# EAGLE board samd21_sensorhub_1.1.1_jan2022 (EAGLE 9.6.2)
MNAME: SensorHub; SYSTEM: ModularSim; VERSION: v1.1.1 Jan 2022
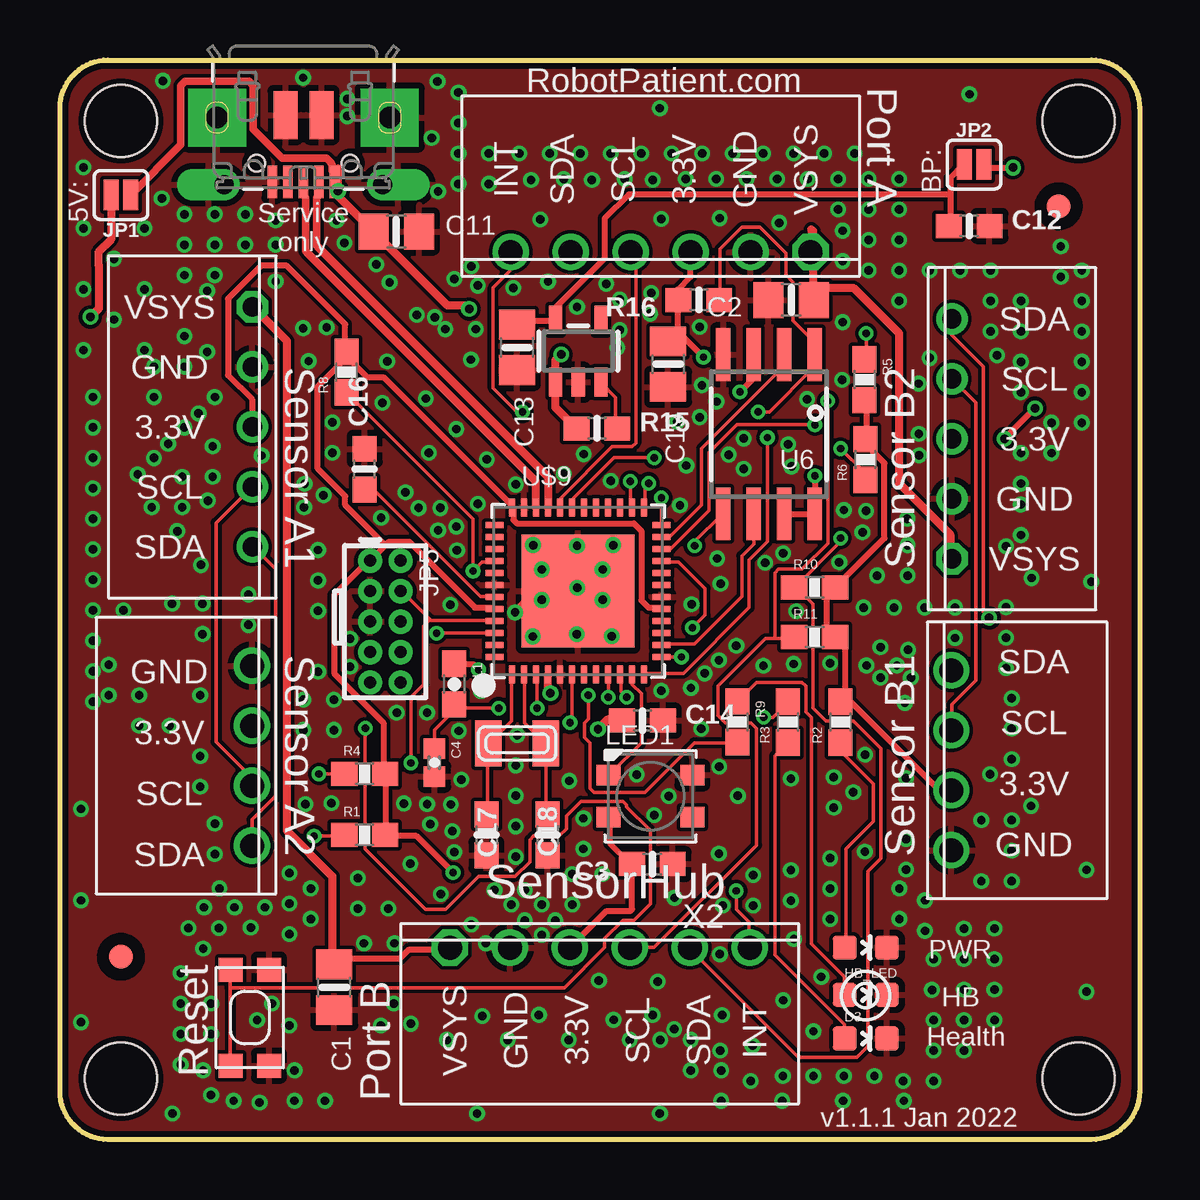
[diagram p0: board, top side]
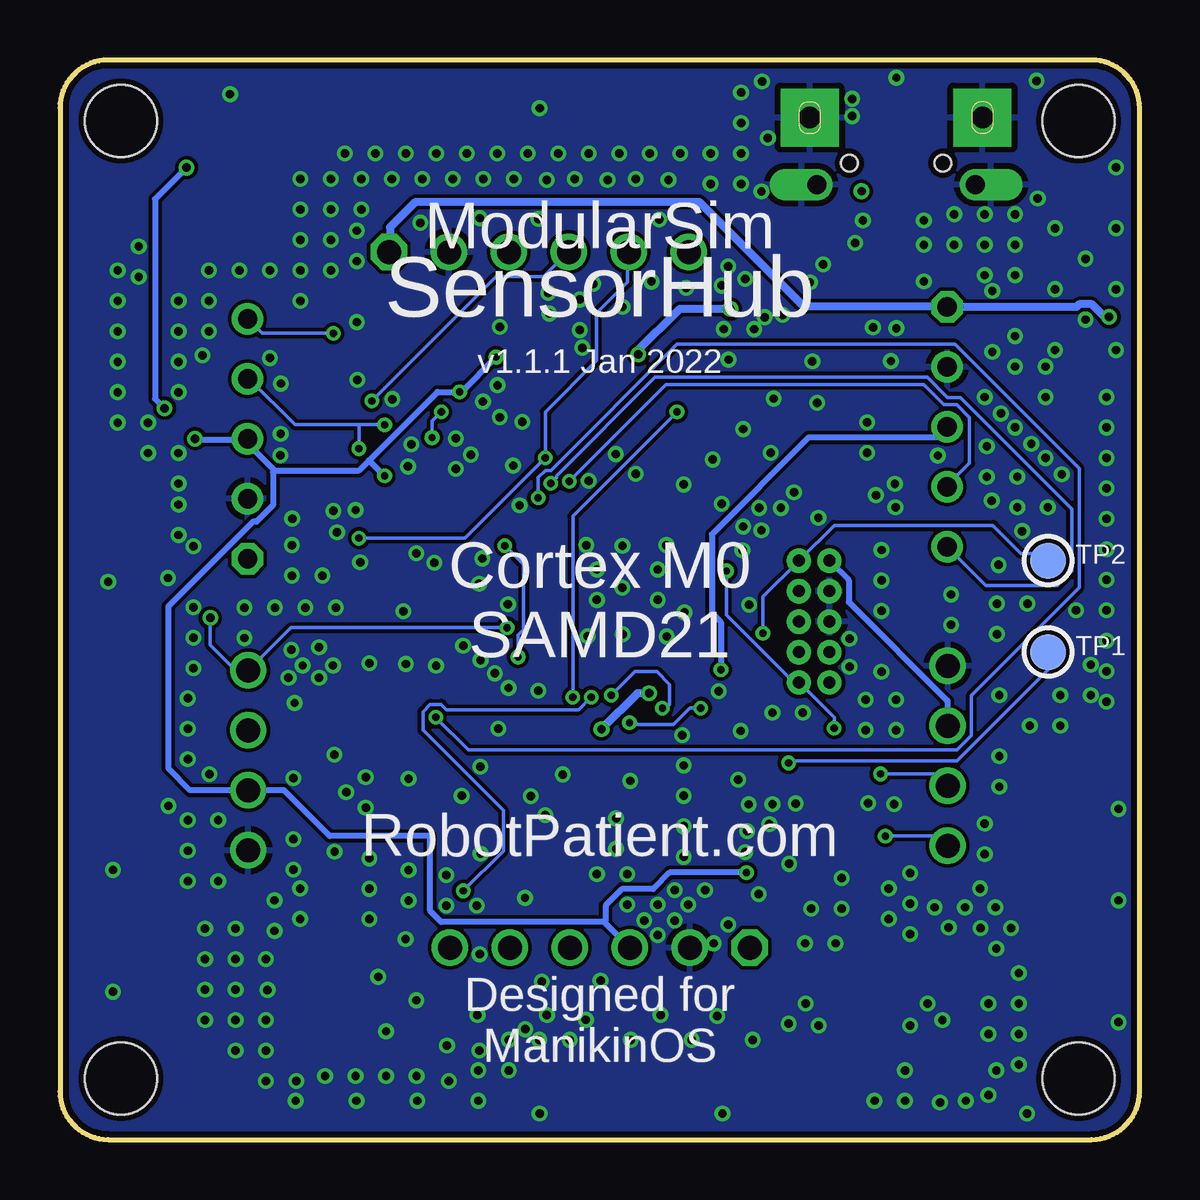
[diagram p1: board, bottom side, seen from below]

Size 45 x 45 mm. Coordinates in mm from the lower left corner, seen from the top.
Outline: 2,45 43,45 arc-90 45,43 45,2 arc-90 43,0 2,0 arc-90 0,2 0,43 arc-90 2,45
Copper layers (1*16): Top 0.035mm / dielectric 1.5mm / Bottom 0.035mm
Design rules "ITEADstudio_DRC_Recent_june2014": minimum track width 6mil, minimum drill 12mil, track to track 6mil, track to pad 6mil, pad to pad 6mil, via to via 6mil, smd to smd 0mil, copper to edge 10mil, drill to drill 10mil, minimum pad ring 10mil, minimum via ring 6mil, stop-mask expansion 2mil, vias tented up to drill 100mil, thermal gap 10mil
Net classes: 1 usb: width 0.152 mm, drill 0.254 mm, clearance 0.152 mm; 2 ground: width 0.254 mm, drill 0.254 mm, clearance 0.152 mm; 3 power: width 0.254 mm, drill 0.254 mm, clearance 0.152 mm
Holes 3 mm at 2.54,42.46 2.54,2.54 42.46,2.54 42.46,42.46

## Footprints (pad centres in the part's own frame; a part is rotated, then mirrored left to right if it is on the bottom)
0805-NO = smd 1.24 x 1.5: 1 -0.95,0; 2 0.95,0
0603-NO = smd 1.075 x 1: 1 -0.85,0; 2 0.85,0
0402-CAP = smd 0.85 x 0.9: 1 -0.58,0; 2 0.58,0
LED-0603 = smd 1 x 1: A 0,-0.877; C 0,0.877
SMT-JUMPER_2_NC_PASTE_SILK = smd 0.635 x 1.27: 1 -0.406,0; 2 0.406,0
2X5-PTH-1.27MM = drill 0.508 pad 1: 1 -2.54,-0.635; 2 -2.54,0.635; 3 -1.27,-0.635; 4 -1.27,0.635; 5 0,-0.635; 6 0,0.635; 7 1.27,-0.635; 8 1.27,0.635; 9 2.54,-0.635; 10 2.54,0.635
0603 = smd 1.1 x 1: 1 -0.85,0; 2 0.85,0
LED3535 = smd 1 x 0.85: 1 -1.75,0.875; 2 -1.75,-0.875; 3 1.75,-0.875; 4 1.75,0.875
0603-RES = smd 1.1 x 1: 1 -0.85,0; 2 0.85,0
KMR2 = smd 1 x 1: 1 2,0.8; 2 2,-0.8; 3 -2,0.8; 4 -2,-0.8
TESTPOINT_ROUND_1.5MM = smd 1.5 x 1.5: P$1 0,0
SOT23-5 = smd 0.55 x 1.2: 1 -0.95,-1.3; 2 0,-1.3; 3 0.95,-1.3; 4 0.95,1.3; 5 -0.95,1.3
SOIC8_208MIL = smd 0.6 x 2.2: 1 -1.905,-3.315; 2 -0.635,-3.315; 3 0.635,-3.315; 4 1.905,-3.315; 5 1.905,3.315; 6 0.635,3.315; 7 -0.635,3.315; 8 -1.905,3.315
PTSM_M6_THRHOLE = drill 1 octagon: P1 6.25,1 | drill 1: P2 3.75,1; P3 1.25,1; P4 -1.25,1; P5 -3.75,1; P6 -6.25,1
PTSM_M4_TH = drill 1: P1 3.75,1; P2 1.25,1; P3 -1.25,1; P4 -3.75,1
TQFN48_7MM = smd 0.25 x 0.75: 1 -2.75,-3.475; 2 -2.25,-3.475; 3 -1.75,-3.475; 4 -1.25,-3.475; 5 -0.75,-3.475; 6 -0.25,-3.475; 7 0.25,-3.475; 8 0.75,-3.475; 9 1.25,-3.475; 10 1.75,-3.475; 11 2.25,-3.475; 12 2.75,-3.475; 25 2.75,3.475; 26 2.25,3.475; 27 1.75,3.475; 28 1.25,3.475; 29 0.75,3.475; 30 0.25,3.475; 31 -0.25,3.475; 32 -0.75,3.475; 33 -1.25,3.475; 34 -1.75,3.475; 35 -2.25,3.475; 36 -2.75,3.475 | smd 0.75 x 0.25: 13 3.475,-2.75; 14 3.475,-2.25; 15 3.475,-1.75; 16 3.475,-1.25; 17 3.475,-0.75; 18 3.475,-0.25; 19 3.475,0.25; 20 3.475,0.75; 21 3.475,1.25; 22 3.475,1.75; 23 3.475,2.25; 24 3.475,2.75; 37 -3.475,2.75; 38 -3.475,2.25; 39 -3.475,1.75; 40 -3.475,1.25; 41 -3.475,0.75; 42 -3.475,0.25; 43 -3.475,-0.25; 44 -3.475,-0.75; 45 -3.475,-1.25; 46 -3.475,-1.75; 47 -3.475,-2.25; 48 -3.475,-2.75 | smd 4.7 x 4.7: THERMAL 0,0
PTSM_M5_THRHOLE = drill 0.8 octagon: P1 5,1 | drill 0.8: P2 2.5,1; P3 0,1; P4 -2.5,1; P5 -5,1
FIDUCIAL_1MM = smd 1 x 1: 1 0,0
XTAL3215 = smd 1.1 x 1.9: P$1 1.2,0; P$2 -1.2,0
4UCONN_20329_V2 = smd 1 x 2: BASE@1 -0.75,-2; BASE@2 0.75,-2 | smd 0.4 x 1.35: D+ 0,0.775; D- -0.65,0.775; GND 1.3,0.775; ID 0.65,0.775; VBUS -1.3,0.775 | drill 0.8 pad 1.143 offset: SPRT@1 -3.3,0.9; SPRT@2 3.3,0.9 | drill 0.9 pad 2.413 square: SPRT@3 -3.6,-1.9; SPRT@4 3.6,-1.9 | hole 0.7: -1.95,0; 1.95,0

## Placement (x,y rotation side)
C1  10uF  [0805-NO]  11.43,6.35 270 top
C2  10uF  [0805-NO]  30.48,35 180 top
C3  1uF  [0603-NO]  24.69,11.48 180 top
C4  0.1uF  [0402-CAP]  15.61,15.71 270 top
C11  10µF  [0805-NO]  14.02,37.85 0 top
C12  1uF  [0603-NO]  37.9,38.07 0 top
C13  10µF  [0805-NO]  19.05,33.02 270 top
C14  1uF  [0603-NO]  24.28,17.46 0 top
C16  1uF  [0603-NO]  12.7,27.94 90 top
C17  22pF  [0603-NO]  17.78,12.7 270 top
C18  22pF  [0603-NO]  20.32,12.7 270 top
C19  10uF  [0805-NO]  25.35,32.32 270 top
D2  GREEN  [LED-0603]  33.59,8 270 top
D3  BLUE  [LED-0603]  33.59,4.21 270 top
HB_LED  RED  [LED-0603]  33.59,6.03 270 top
JP1  JUMPER-SMT_2_NC_PASTE_SILK  [SMT-JUMPER_2_NC_PASTE_SILK]  2.54,39.37 180 top
JP2  JUMPER-SMT_2_NC_PASTE_SILK  [SMT-JUMPER_2_NC_PASTE_SILK]  38.1,40.64 0 top
JP5  CORTEX_DEBUGPTH  [2X5-PTH-1.27MM]  13.56,21.59 270 top
L1  FB - 30Ohm  [0603]  16.43,18.99 270 top
LED1  WS2812B3535  [LED3535]  24.61,14.31 0 top
R1  4k7  [0603-RES]  12.7,12.7 0 top
R2  470Ω  [0603-RES]  32.54,17.4 90 top
R3  330  [0603-RES]  30.35,17.4 90 top
R4  4k7  [0603-RES]  12.7,15.24 0 top
R5  4k7  [0603-RES]  33.54,31.67 270 top
R6  4k7  [0603-RES]  33.58,28.35 90 top
R8  10K  [0603-RES]  11.95,31.99 90 top
R9  330  [0603-RES]  28.23,17.41 270 top
R10  4k7  [0603-RES]  31.46,23.01 0 top
R11  4k7  [0603-RES]  31.46,20.94 0 top
R15  100k  [0603-NO]  22.38,29.64 0 top
R16  10K  [0603-NO]  26.63,35 180 top
SW1  SPST_TACT-KMR2  [KMR2]  7.91,5.08 90 top
TP1  [TESTPOINT_ROUND_1.5MM]  3.81,20.32 0 bottom
TP2  [TESTPOINT_ROUND_1.5MM]  3.81,24.13 0 bottom
U4  AP2112-3.3  [SOT23-5]  21.6,32.87 0 top
U6  2MB Flash  [SOIC8_208MIL]  29.55,29.4 180 top
U$1  PHOENIX_PTSM_M6_TH_I2CPPANGLE  [PTSM_M6_THRHOLE]  22.5,9 180 top
U$2  PHOENIX_PTSM_M6_TH_I2CPPANGLE  [PTSM_M6_THRHOLE]  25.04,36 0 top
U$4  PHOENIX_PTSM_M4_THANGLE  [PTSM_M4_TH]  36.15,15.81 270 top
U$8  PHOENIX_PTSM_M4_THANGLE  [PTSM_M4_TH]  9,16 90 top
U$9  ATSAMD21G18_QFN  [TQFN48_7MM]  21.59,22.86 0 top
U$18  PHOENIX_PTSM_M5_TH_I2C++  [PTSM_M5_THRHOLE]  36.18,29.21 270 top
U$21  PHOENIX_PTSM_M5_TH_I2C++  [PTSM_M5_THRHOLE]  9.02,29.71 90 top
U$34  FIDUCIAL""  [FIDUCIAL_1MM]  41.63,38.9 0 top
U$35  FIDUCIAL""  [FIDUCIAL_1MM]  2.54,7.62 0 top
X2  32.768  [XTAL3215]  19.05,16.51 180 top
X3  microUSB  [4UCONN_20329_V2]  10.15,40.7 180 top

## Library data of the parts
C1-C3 C11-C14 C16-C19 LED1 R15 R16 TP1 TP2 U4 U6 U$9 X3 = microbuilder
C4 = SparkFun-Capacitors; PROD_ID: CAP-12416
D2 HB_LED = SparkFun-LED; PROD_ID: DIO-00819
D3 = SparkFun-LED; PROD_ID: DIO-08575
JP1 JP2 = SparkFun-Jumpers
JP5 = samd21-temp
L1 = SparkFun-Passives; PROD_ID: RES-07859
R1-R6 R9-R11 = SparkFun-Resistors; PROD_ID: RES-00818
R8 = SparkFun-Resistors; PROD_ID: RES-00824
SW1 = adafruit
U$1 U$2 U$4 U$8 U$18 U$21 = jk_customs
U$34 U$35 = microbuilder; BOM: EXCLUDE
X2 = adafruit2

## Nets
3.3V [power]: C3.2 C19.1 JP2.2 JP5.1 L1.1 LED1.2 R1.2 R2.2 R4.2 R5.2 R6.2 R8.2 R10.2 R11.2 R16.2 U6.3 U6.7 U6.8 U$1.P3 U$2.P3 U$4.P2 U$8.P2 U$9.17 U$9.36 U$9.44 U$18.P3 U$21.P3
3.3V_AP [power]: C12.1 C13.1 JP2.1 U4.5
5V [power]: C1.1 C2.1 JP1.2 U$1.P1 U$2.P1 U$18.P1 U$21.P1
!RESET: JP5.10 R8.1 SW1.1 SW1.3 U$9.40
A5: U$9.47
AREF [power]: C14.1 U$9.4
D0: U$9.16
D1: U$9.15
D2_FLASHMISO: U6.2 U$9.23
D3_FLASHSCK: U6.6 U$9.14
D4_FLASHMOSI: U6.5 U$9.13
D5_HEALTH: R3.2 U$9.24
D5_HEALTH_LED: D3.A R3.1
D6: U$9.29
D7: U$9.30
D8_NEOPIX: LED1.1 U$9.11
D10: U$9.27
D12: U$9.28
D14_HB: R9.2 U$9.3
D14_HB_LED: HB_LED.A R9.1
EN: R15.2 U4.3
FLASH_CS: R16.1 U6.1 U$9.12
GND [ground]: C1.2 C2.2 C3.1 C4.2 C11.2 C12.2 C13.2 C14.2 C16.2 C17.2 C18.2 C19.2 D2.C D3.C HB_LED.C JP5.3 JP5.5 LED1.4 SW1.2 SW1.4 U4.2 U6.4 U$1.P2 U$2.P2 U$4.P1 U$8.P1 U$9.5 U$9.18 U$9.35 U$9.42 U$9.THERMAL U$18.P2 U$21.P2 X3.BASE@1 X3.BASE@2 X3.GND X3.SPRT@1 X3.SPRT@2 X3.SPRT@3 X3.SPRT@4
INT4: U$1.P6 U$9.9
INT5: U$2.P6 U$9.10
INT8: U$9.7
INT9: U$9.8
MOSI: U$9.19
N$5: D2.A R2.1
N$8: X3.ID
N$15: C17.1 U$9.1 X2.P$1
N$17: C18.1 U$9.2 X2.P$2
RXLED: U$9.48
SCK: U$9.20
SCL: R11.1 U$1.P4 U$2.P4 U$9.32
SCL_SENSOR0: R6.1 U$4.P3 U$9.22 U$18.P4
SCL_SENSOR1: R4.1 U$8.P3 U$9.26 U$21.P4
SDA: R10.1 U$1.P5 U$2.P5 U$9.31
SDA_SENSOR0: R5.1 U$4.P4 U$9.21 U$18.P5
SDA_SENSOR1: R1.1 U$8.P4 U$9.25 U$21.P5
SWCLK: JP5.4 TP1.P$1 U$9.45
SWDIO: JP5.2 TP2.P$1 U$9.46
TXLED: U$9.39
USB_D_N [usb]: U$9.33 X3.D-
USB_D_P [usb]: U$9.34 X3.D+
VBUS [power]: C11.1 JP1.1 R15.1 U4.1 X3.VBUS
VDDANA: C4.1 L1.2 U$9.6
VDDCORE1: C16.1 U$9.43

## Tracks (layer width: path | path; a pad name or v marks a point on that pad's centre or on a via)
3.3V  (via drill 0.3, 0.35)
  Top 0.254: R5.2 33.6,30.79 33.6,29.26 R6.2 33.68,29.11 33.68,28.88 34.37,28.19 34.37,25.07 32.38,23.09 R10.2 31.94,22.64 31.94,21.31 R11.2 32.38,20.88 32.72,20.55 32.72,18.43 R2.2 32.61,18.21 32.99,18.21 36.58,14.63 37.11,14.63 U$4.P2 | U6.7 30.25,26.06 31.39,26.06 U6.8 31.47,26.21 v31.47,27.66 | v28.35,31.17 28.88,31.7 28.88,32.69 U6.3 | v26.82,32.61 25.83,33.6 C19.1 25.38,33.3 25.76,33.68 25.76,35.28 R16.2 25.76,35.43 26.29,35.97 26.29,36.96 U$2.P3 | v17.45,19.58 17.22,19.81 16.46,19.81 L1.1 | LED1.2 22.94,13.41 22.94,12.34 23.77,11.51 C3.2 23.85,11.35 23.85,9.6 23.77,9.53 22.78,9.53 U$1.P3 | U$9.17 24.99,22.17 24.54,22.17 24.23,22.48 24.23,25.38 23.93,25.68 19.05,25.68 18.9,25.83 18.9,26.29 U$9.36 18.82,26.44 13.49,31.77 12.8,31.77 11.96,32.61 R8.2 | 13.56,24.77 12.95,24.16 JP5.1 12.8,24.08 11.43,22.71 11.43,19.43 13.49,17.37 13.49,15.32 R4.2 13.56,15.24 13.56,12.72 R1.2 13.64,12.65 14.86,12.65 v16.38,11.12 | 13.56,24.77 13.72,24.92 14.55,24.92 17.3,22.17 18.06,22.17 U$9.44 | 13.56,24.77 11.89,26.44 11.89,26.82 10.74,27.96 10.74,31.39 11.89,32.54 11.89,32.77 R8.2 | U$21.P3 8,29.72 8,30.86 7.01,31.85 7.01,35.05 8.38,36.42 9.45,36.42 11.89,33.98 11.89,32.92 R8.2 | JP2.2 38.63,40.51 v39.73,40.51 | v40.64,30.48 v39.37,29.21
  Bottom 0.254: 32.12,28.31 32.54,27.89 36.04,27.89 | 32.12,28.31 29.26,31.17 v28.35,31.17 28.27,31.17 v26.82,32.61 | 36.04,27.89 37.11,28.96 37.11,29.18 | 37.11,29.18 U$18.P3 | 32.12,28.31 v31.47,27.66 | 36.04,27.89 36.12,27.81 36.12,26.44 36.8,25.76 36.96,25.76 40.49,22.23 40.49,15.48 39.57,14.56 U$4.P2 37.03,14.55 35.66,14.55 33.76,12.65 29.57,12.65 29.57,9.53 29.11,9.07 22.33,9.07 | v17.45,19.58 17.45,21.57 17.83,21.95 17.83,25.22 13.79,29.26 8.46,29.26 8.08,29.64 U$21.P3 | U$8.P2 8,17.3 8,18.29 12.12,22.4 12.12,23.32 12.88,24.08 JP5.1 | v39.73,40.51 41.03,39.2 41.03,30.87 v40.64,30.48 | v39.37,29.21 39.34,29.18 37.11,29.18 | 22.33,9.07 U$1.P3 | v16.38,11.12 19.58,11.12 20.27,10.44 21.57,10.44 22.25,9.75 22.25,9.14 22.33,9.07
3.3V_AP
  Top 0.254: C13.1 19.05,33.98 19.2,34.14 20.65,34.14 U4.5 20.65,34.29 20.65,34.67 22.71,36.73 22.71,38.41 23.7,39.4 37.11,39.4 | 37.11,39.4 37.11,40.08 37.64,40.62 JP2.1 | 37.11,39.4 37.11,38.1 C12.1
5V  (via drill 0.35)
  Top 0.254: U$1.P1 16.23,7.92 14.55,7.92 14.17,7.54 11.51,7.54 C1.1
  Top 0.33: U$2.P1 31.32,37.95 31.39,37.87 31.39,35.59 C2.1 31.55,35.51 33.07,35.51 34.98,33.6 34.98,27.36 37.11,25.22 37.11,24.23 U$18.P1 | C1.1 11.35,7.39 11.35,10.97 9.45,12.88 9.45,33.3 8.08,34.67 U$21.P1 | JP1.2 2.13,37.51 1.6,36.98 1.6,36.45 1.62,36.43 1.62,34.64 v1.27,34.29
  Bottom 0.33: U$2.P1 31.24,38.02 30.18,39.09 18.36,39.09 14.02,34.75 8.08,34.75 U$21.P1 2.63,34.7 2.52,34.82 1.98,34.82 1.45,34.29 v1.27,34.29
!RESET  (via drill 0.3)
  Top 0.152: 7.09,6.33 7.09,7.01 SW1.1 | 7.09,6.33 7.09,3.12 SW1.3 | U$9.40 18.06,24.08 17.6,24.08 v17.22,23.7 17.22,25.87 R8.1 | 7.09,6.33 21.03,6.33 22.71,8 22.71,8.38 23.47,9.14 23.93,9.14 24.61,9.83 24.61,12.88 23.62,13.87 23.62,13.95 23.47,14.1 21.72,14.1 21.11,13.49 21.11,12.95 20.8,12.65 19.74,12.65 19.58,12.5 19.58,11.58 18.97,10.97 17.45,10.97 16.08,9.6 15.24,9.6 12.72,12.12 v12.72,17.14
  Bottom 0.152: v17.22,23.7 17.22,21.87 14.4,19.05 JP5.10 14.17,19.05 12.72,17.6 v12.72,17.14
AREF  (via drill 0.35)
  Top 0.33: v22.43,17.11 22.82,17.5 23.41,17.5 C14.1 | U$9.4 20.34,19.36 20.34,18.82 v20.44,18.6
  Bottom 0.33: v20.44,18.6 20.93,18.6 v22.43,17.11
D2_FLASHMISO
  Top 0.152: U$9.23 25.07,25.15 25.45,25.15 26.75,26.44 26.75,28.8 30.18,32.23 30.18,32.69 U6.2
D3_FLASHSCK
  Top 0.152: U6.6 28.92,24.83 28.42,24.33 28.42,22.63 26.44,20.65 25.07,20.65 U$9.14
D4_FLASHMOSI  (via drill 0.3)
  Top 0.152: v25.91,20.12 U$9.13 | v26.45,24.75 26.45,24.93 27.58,26.06 U6.5
  Bottom 0.152: v25.91,20.12 25.91,21.03 25.68,21.26 25.68,23.98 v26.45,24.75
D5_HEALTH  (via drill 0.3)
  Top 0.152: v25.07,26.75 25.07,25.68 U$9.24 | v29.34,17.6 29.72,17.6 30.33,18.21 R3.2
  Bottom 0.152: v25.07,26.75 25.07,27.58 24.77,27.89 24.54,27.89 19.28,33.15 7.7,33.15 2.52,27.96 2.52,23.01 7.01,18.52 7.01,16.84 7.62,16.23 27.96,16.23 v29.34,17.6
D5_HEALTH_LED
  Top 0.152: D3.A 32.69,4.27 32.69,4.8 29.79,7.7 29.79,15.99 R3.1
D8_NEOPIX
  Top 0.152: U$9.11 23.85,19.36 23.85,18.97 24.23,18.59 24.23,16.54 22.94,15.24 LED1.1
D14_HB  (via drill 0.3)
  Top 0.152: R9.2 28.19,16.54 26.44,16.54 24.38,14.48 22.25,14.48 22.1,14.63 22.1,16.54 21.87,16.76 21.87,17.37 22.02,17.53 v22.02,18.52 | v19.89,17.98 19.89,19.36 U$9.3
  Bottom 0.152: v19.89,17.98 19.81,17.91 19.58,18.14 19.58,18.97 20.12,19.51 21.03,19.51 v22.02,18.52
D14_HB_LED
  Top 0.152: HB_LED.A 32.69,6.1 32.69,6.78 31.32,8.15 31.32,17.6 31.09,17.83 31.09,18.9 30.94,19.05 29.03,19.05 28.27,18.29 R9.1
EN
  Top 0.152: R15.2 23.16,29.64 23.16,30.94 22.55,31.55 U4.3
FLASH_CS  (via drill 0.3)
  Top 0.152: v29.49,29.26 29.49,24.92 28.73,24.16 28.73,22.17 25.98,19.43 24.38,19.43 U$9.12 | v29.11,30.33 29.57,30.33 31.39,32.16 31.39,32.69 U6.1 | 31.39,33.3 31.39,32.77 U6.1 | 31.39,33.3 30.56,34.14 30.56,35.74 30.25,36.04 30.25,36.96 29.18,38.02 28.42,38.02 27.51,37.11 27.51,35.36 R16.1 | 31.39,33.3 U6.1
  Bottom 0.152: v29.49,29.26 29.49,29.95 v29.11,30.33
GND  (via drill 0.35)
  Top 0.33: U$9.THERMAL 19.86,22.86 v18.97,21.97
  other vias: 10.99,26.86 13.39,25.92 14.4,26.97 15.38,28.63 19.72,24.78 23.06,24.78 21.55,24.75 19.71,20.97 23,20.98 21.56,23 26.11,28.09 28.5,27.95 30.49,28.05 25.84,26.44 21.55,34.71 29.98,38.21 27.36,40.04 24.71,40.01 22.17,40.01 19.63,40.01 18.9,35.5 11.53,38.32 8.99,38.32 8.99,35.78 11.11,33.86 13.64,32.44 11.35,28.63 11.42,17.07 14.03,17.79 15.3,17.79 15.3,13.98 10.22,13.98 9.56,9.83 12.42,10.9 14.61,11.49 17.75,8.18 13.94,8.18 14.63,4.83 10.36,32.45 17.13,32.51 15.62,34.28 17.14,36.4 13.18,36.47 40.06,25.2 33.62,19.76 29.32,19.75 27.47,19.98 26.3,18.82 28.26,14.33 24.77,13.53 27.47,11.91 32.26,15.1 30.47,15.04 30.47,11.23 32.11,11.72 34.99,10.46 30.15,5.8 25.6,4.6 19.96,5.19 17.6,5.14 8.22,4.98 8.32,1.54 6.63,8.81 36.35,6.24 35.14,2.44 36.06,8.7 39.67,15.85 35.22,18.2 34.06,23.51 39.43,22.19 27.39,24.22 32.68,26.24 32.63,34.07 31.14,30.86 36.25,32.58 35.8,29.41 13.44,30.71 7.85,22.72 5.94,21.07 5.84,18.52 5.84,14.71 16.73,15 19.06,16.85 24.04,15.21 25.37,14.31 21.23,14.95 25.06,18.71 26.73,17.12 30.15,24.43 30.58,19.82 27.48,15.54 28.89,11.02 27.51,7.72 24.92,6.58 24.7,5.18 27.6,5.18 31.41,4.51 31.74,6.78 30.59,8.36 21.01,27.75 19,27.3 17.79,28.35 22.96,27.46 21.83,28.57 17.41,26.5 16.55,24.56 16.52,25.55 15.85,26.33 14.95,26.33 15.76,25.4 21.54,21.06 26.33,22.31 27.53,23.16 28.19,20.59 26.87,19.43 33.5,22.17 34.77,22.17 34.89,19.76 35.33,23.51 35.33,24.78 33.6,26.2 33.45,25.31 29.4,24.04 35.27,15.06 35.27,12.52 33.55,12 28.87,3.91 30.14,2.64 31.41,2.64 32.68,2.64 33.95,2.64 27.52,3.71 28.79,2.44 25.62,10.07 23.08,4.99 22.47,6.63 20.08,8.52 21.35,9.79 22.62,11.06 21.82,12.12 19,15.6 19,14.33 19,13.06 19,11.79 21.82,13.39 16.36,12.85 15.88,10.22 17.14,8.95 13.69,9.63 12.42,9.63 9.56,11.1 9.56,8.56 12.67,8.18 10.45,9.19 10.45,10.46 6.64,10.46 9.56,4.75 13.37,4.75 13.92,5.66 8.84,5.66 6.3,5.66 5.03,4.39 5.03,5.66 6.3,4.39 5.03,6.93 5.36,8.81 5.97,7.96 7.95,8.84 6.01,9.68 7.28,9.68 8.55,9.68 4.57,17.25 5.84,15.98 3.3,18.52 3.3,17.25 10.15,17.07 10.15,18.34 11.42,18.34 10.76,19.49 10.76,22.03 10.76,23.3 10.76,24.57 10.17,26.35 6.36,27.62 5.09,26.35 6.45,30.95 5.18,29.68 3.91,28.41 1.37,27.14 1.37,28.41 3.91,30.95 5.18,32.22 6.45,36.03 5.18,33.49 3.91,32.22 1.37,29.68 5.18,36.03 7.72,37.3 6.45,37.3 7.72,38.57 6.45,38.57 5.18,38.57 15.49,41.74 16.61,43.65 16.61,42.38 16.61,41.11 16.61,39.84 15.76,39.52 17.88,41.11 19.15,41.11 20.42,41.11 17.88,39.84 21.69,41.11 22.96,41.11 24.23,41.11 25.5,41.11 26.77,41.11 28.04,41.11 26.09,40.04 23.55,40.04 21.01,40.04 28.63,40.04 29.31,41.11 30.58,41.11 31.85,41.11 33.12,41.11 29.9,40.04 31.17,40.04 32.44,40.04 33.71,40.04 33.71,38.77 32.44,38.77 33.71,37.5 33.71,36.23 34.98,38.77 34.98,37.5 34.98,36.23 34.98,34.96 36.25,36.23 37.52,36.23 38.79,36.23 38.79,34.96 34.98,40.04 41.72,37.22 40.06,34.96 40.06,32.42 40.06,33.69 38.79,33.69 39.07,32.69 40.06,31.15 41.33,29.88 40.06,28.61 40.06,27.34 35.81,28.52 35.79,31.51 35.32,25.88 36.04,22.17 37.31,22.17 37.31,20.9 39.43,20.92 39.43,19.65 40.06,26.47 40.5,23.41 39.43,24.73 39.67,17.12 39.67,18.39 40.47,13.91 39.67,13.31 38.4,13.31 38.4,10.77 39.67,12.04 39.67,10.77 34.99,9.19 36.06,9.97 35.27,11.25 32.11,10.45 32.11,9.18 30.47,9.96 28.89,9.75 27.62,9.75 1.37,25.87 1.37,24.6 1.37,23.33 1.37,22.06 2.64,22.06 1.37,20.79 5.94,22.34 4.67,22.34 5.88,23.95 3.82,26.35 5.09,27.62 6.36,28.89 6.16,26.63 1.37,19.52 1.37,18.25 2.03,19.79 2.03,18.52 6.45,13.17 6.45,11.9 11.32,14.02 14.34,14.01 16.29,13.97 15.43,13.14 16.43,11.98 18.11,10.4 19.38,10.4 19.38,9.13 20.65,9.13 20.08,9.79 18.81,9.79 21.35,11.06 17.54,18.68 20.08,22.49 22.62,22.49 22.62,23.76 20.08,23.76 16.27,22.29 12.09,20.88 12.09,19.71 8.41,28.51 10.2,27.33 10.13,33.82 6.13,32.83 6.13,35.37 8.99,37.3 4.24,39.23 5.18,37.3 0.98,40.53 3.52,37.99 0.98,37.99 2.25,36.72 3.52,35.45 2.25,34.18 0.98,35.45 0.98,32.91 3.52,32.91 1.37,30.95 6.3,1.85 5.03,3.12 5.97,2.88 7.24,1.61 9.78,1.61 11.05,1.61 9.78,2.88 16.13,4.15 18.67,4.15 21.21,4.15 23.75,4.15 25.02,4.15 26.29,4.15 26.29,2.88 27.56,2.88 27.56,1.61 30.1,1.61 32.64,1.61 35.18,1.61 36.41,2.44 36.41,3.71 37.68,3.71 38.95,4.98 37.68,4.98 36.41,4.98 37.68,6.25 36.41,7.52 37.68,8.79 37.68,7.52 38.95,7.52 38.95,6.25 38.95,8.79 38.77,15.23 32.6,31.66 32.63,36.61 32.63,37.88 20.35,35.76 22.77,35.67 23.23,33.01 26.76,31.45 24.65,35.29 23.33,35.01 23.33,33.74 17.34,33.78 16.07,33.78 17.41,35.6 16.43,35.88 14.87,34.38 13.74,35.73 11.85,37.38 11.35,29.9 4.89,25.36 3.24,27.72 4.51,28.99 5.78,30.26 7.85,21.45 16.62,17.03 34.2,20.52 34.2,19.25 35.47,19.25 35.36,20.41 28.5,29.22 27.88,28.55 30.35,28.98 16.52,29.62 15.25,30.89 25.73,29.92 26.67,30.11 27.37,30.76 26.67,33.87 24.6,34.43 20.02,38.35 25.06,38.38 27.5,38.4 42.6,32.42 42.6,33.69 42.6,31.15 42.6,29.88 42.6,34.96 41.72,35.95 42.6,36.23 41.33,28.61 37.91,43.57 42.99,23.25 42.79,11.24 42.79,6.16 25.01,1.08 17.39,1.08 0.88,9.97 0.88,13.78 0.88,4.89 4.69,1.08 25.01,42.99 11.98,43.38 32.11,19.85 30.68,22.02 32.49,24.07 32.26,13.83 33.07,14.48 33.57,16.04 4.29,44.13 11.98,42.66 10.13,44.26 15.74,44.11
  pour Top: 54.61,49.53 54.61,-3.81 -5.08,-3.81 -5.08,49.53
  pour Bottom: 55.88,49.53 55.88,-2.54 -6.35,-2.54 -6.35,49.53
INT4  (via drill 0.3)
  Top 0.152: v22.86,18.44 22.86,19.36 U$9.9 | v28.19,10.36 28.19,9.6 28.73,9.07 28.73,8 U$1.P6
  Bottom 0.152: v22.86,18.44 23.39,17.91 28.88,17.91 29.11,18.14 29.57,18.14 29.87,17.83 29.87,17.07 26.52,13.72 26.52,12.04 v28.19,10.36
INT5  (via drill 0.3)
  Top 0.152: v23.62,18.44 23.39,18.67 23.39,19.36 U$9.10 | v19.28,30.33 19.05,30.33 18.06,31.32 18.06,35.51 18.75,36.2 18.75,36.96 U$2.P6
  Bottom 0.152: v23.62,18.44 23.62,25.98 v19.28,30.33
N$5
  Top 0.152: D2.A 32.77,8 32.77,12.12 33.91,13.26 33.91,14.82 32.54,16.19 R2.1
N$15
  Top 0.152: U$9.1 18.82,19.36 18.82,17.45 17.91,16.54 X2.P$1 17.83,16.46 17.83,13.56 C17.1
N$17
  Top 0.152: U$9.2 19.36,19.36 19.36,17.37 20.19,16.54 X2.P$2 20.27,16.46 20.27,13.56 C18.1
SCL  (via drill 0.3)
  Top 0.152: U$9.32 20.88,26.36 20.88,26.75 23.01,28.88 23.85,28.88 24,29.03 24,36.8 23.85,36.96 U$2.P4 | 29.79,20.88 29.41,20.88 27.43,18.9 27.43,17.68 27.74,17.37 28.8,17.37 29.03,17.14 29.03,12.27 24.77,8 23.77,8 U$1.P4 | 29.79,20.88 30.56,20.88 R11.1 | 29.79,20.88 29.79,23.62 29.95,23.77 30.94,23.77 32,24.84 v32,30.79
  Bottom 0.152: v32,30.79 26.82,35.97 24.84,35.97 23.85,36.96 U$2.P4
SCL_SENSOR0  (via drill 0.3)
  Top 0.152: v31.47,29.79 28.22,29.79 27.05,28.63 27.05,26.21 25.45,24.61 U$9.22 | v32.54,28.8 33.53,27.81 33.53,27.51 R6.1 | U$4.P3 37.19,17.07 37.19,18.14 38.18,19.13 38.18,30.71 U$18.P4
  Bottom 0.152: 32.54,29.79 35.2,29.79 37.11,31.7 U$18.P4 | 32.54,29.79 v31.47,29.79 | 32.54,29.79 v32.54,28.8
SCL_SENSOR1  (via drill 0.3)
  Top 0.152: v10.79,15.24 R4.1 | v23.77,27.43 23.77,26.36 U$9.26 | U$8.P3 7.92,14.78 7.92,15.15 6.5,16.57 6.5,25.7 8,27.2 U$21.P4
  Bottom 0.152: v10.79,15.24 8.46,15.24 8,14.78 U$8.P3 | v23.77,27.43 19.74,31.47 8.99,31.47 8.15,30.63 7.62,30.63 7.09,30.1 7.09,28.19 8,27.28 U$21.P4
SDA  (via drill 0.3)
  Top 0.152: v24.77,28.42 23.09,28.42 21.41,26.75 21.41,26.36 U$9.31 | v32.54,25.07 32.54,24.92 30.63,23.01 R10.1 30.71,23.01 31.39,22.33 31.39,17.98 31.93,17.45 33.07,17.45 34.21,16.31 34.21,11.71 33.68,11.18 33.68,3.89 33.22,3.43 30.79,3.43 26.29,7.92 U$1.P5
  Bottom 0.152: v32.54,25.07 28.12,25.07 v24.77,28.42 24.77,30.33 22.63,32.46 22.63,34.44 21.34,35.74 21.34,36.96 U$2.P5
SDA_SENSOR0  (via drill 0.3, 0.35)
  Top 0.152: v33.6,33.6 33.6,32.54 R5.1 | v26.36,21.34 26.89,21.86 26.89,22.97 25.78,24.08 25.07,24.08 U$9.21 | U$18.P5 37.19,34.14 37.19,33.53 38.49,32.22 38.49,21.99 v38.73,21.75
  Bottom 0.152: v33.6,33.6 36.58,33.6 37.11,34.14 U$18.P5 | v26.36,21.34 35.36,21.34 37.11,19.58 U$4.P4 37.68,19.56 38.73,20.61 v38.73,21.75
SDA_SENSOR1  (via drill 0.3)
  Top 0.152: v10.59,12.65 11.81,12.65 R1.1 | v24.54,27.36 24.38,27.2 24.38,26.36 U$9.25 | U$8.P4 8,12.27 8,13.34 8.99,14.33 8.99,23.77 8.08,24.69 U$21.P5
  Bottom 0.152: v10.59,12.65 8.38,12.65 8,12.27 U$8.P4 | v24.54,27.36 24.31,27.58 24.31,27.66 20.19,31.77 8.84,31.77 8,30.94 7.47,30.94 2.82,26.29 2.82,23.7 3.43,23.09 6.4,23.09 8,24.69 U$21.P5
SWCLK  (via drill 0.3)
  Top 0.152: 15.43,21.68 14.25,22.86 JP5.4 | 15.43,21.68 15.47,21.64 18.06,21.64 U$9.45 | v14.63,15.7 14.63,18.44 15.16,18.97 15.16,21.41 15.43,21.68
  Bottom 0.152: TP1.P$1 3.81,19.58 7.62,15.77 14.55,15.77 v14.63,15.7
SWDIO  (via drill 0.3)
  Top 0.152: v15.7,21.11 18.06,21.11 U$9.46
  Bottom 0.152: v15.7,21.11 15.7,22.63 14.25,24.08 JP5.2 14.17,24.16 12.72,25.6 6.11,25.6 4.94,24.43 3.81,24.43 TP2.P$1
USB_D_N
  Top 0.305: X3.D- 10.8,39.35 10.7,39.26 10.7,37.25 10.73,37.22
  Top 0.33: U$9.33 20.34,27.61 10.73,37.22
USB_D_P
  Top 0.305: X3.D+ 10.15,39.35 10.24,39.26 10.24,37.03 10.3,36.97
  Top 0.33: U$9.34 19.84,27.43 10.3,36.97
VBUS  (via drill 0.35)
  Top 0.305: v11.59,39.53 11.59,40.5 X3.VBUS 11.45,40.28 11.34,40.39 11.34,40.64 11.3,40.68 11.3,40.73 11.12,40.91 9.26,40.91 8.06,42.11 8.06,43.93 7.88,44.11 5.21,44.11 5.04,43.93 5.04,41.46 JP1.1
  Top 0.33: v11.59,39.53 11.59,39.33 C11.1 16.14,34.77 16.9,34.77 v17.06,34.62 | v20.89,32.73 20.65,32.49 U4.1 20.65,30.52 R15.1
  Bottom 0.33: v17.06,34.62 19.18,34.62 20.98,32.82 v20.89,32.73
VDDANA  (via drill 0.3)
  Top 0.152: v21.26,17.37 21.34,17.45 21.34,19.36 U$9.6 | v18.29,17.98 16.61,17.98 16.46,18.14 L1.2 16.54,17.98 15.62,17.07 15.62,16.31 C4.1
  Bottom 0.152: v21.26,17.37 21.18,17.3 19.43,17.3 18.75,17.98 v18.29,17.98
VDDCORE1
  Top 0.152: U$9.43 18.06,22.63 17.53,22.63 13.11,27.05 12.72,27.05 C16.1

## Text on the board
_tsilk: RobotPatient.com | Port A | BP: | 5V: | Service / only | Sensor A1 | Sensor B2 | Sensor A2 | Sensor B1 | PWR | HB | Health | Reset | Port B
_bsilk: Cortex M0 / SAMD21 | RobotPatient.com | Designed for / ManikinOS